# Altium PCB NodeBoard.PcbDoc
Units mm, origin at the board's own origin, x right, y up, seen from the top; angles counter-clockwise.
Board outline 129.64 x 129.64 mm, 2 copper layers (Top Layer, Bottom Layer); 22 components, 40 nets, 178 pads, 8 vias.
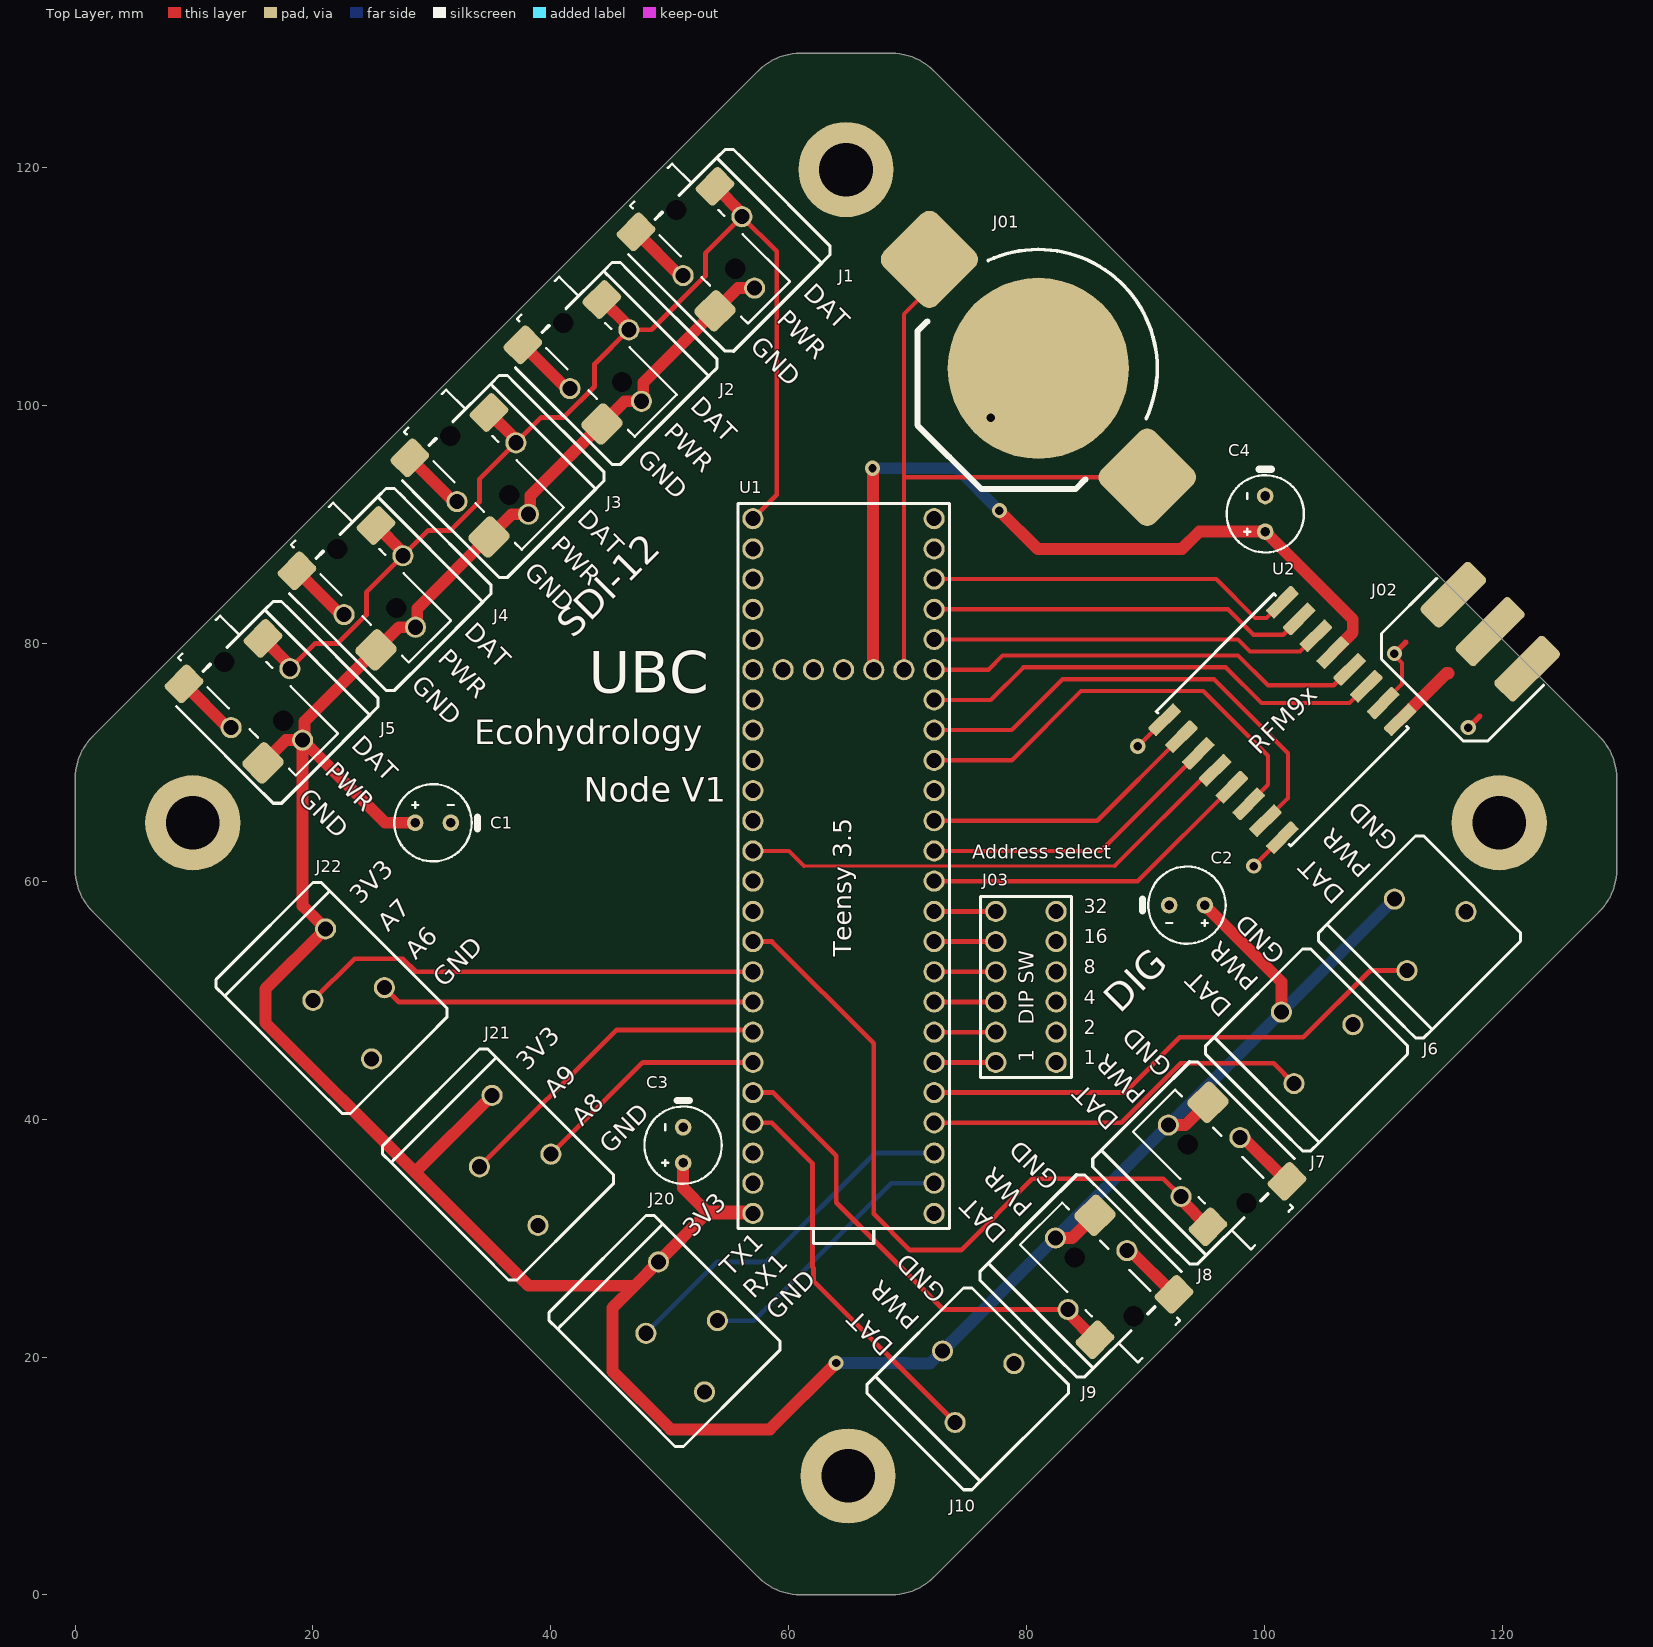
[diagram p0: Top Layer view]
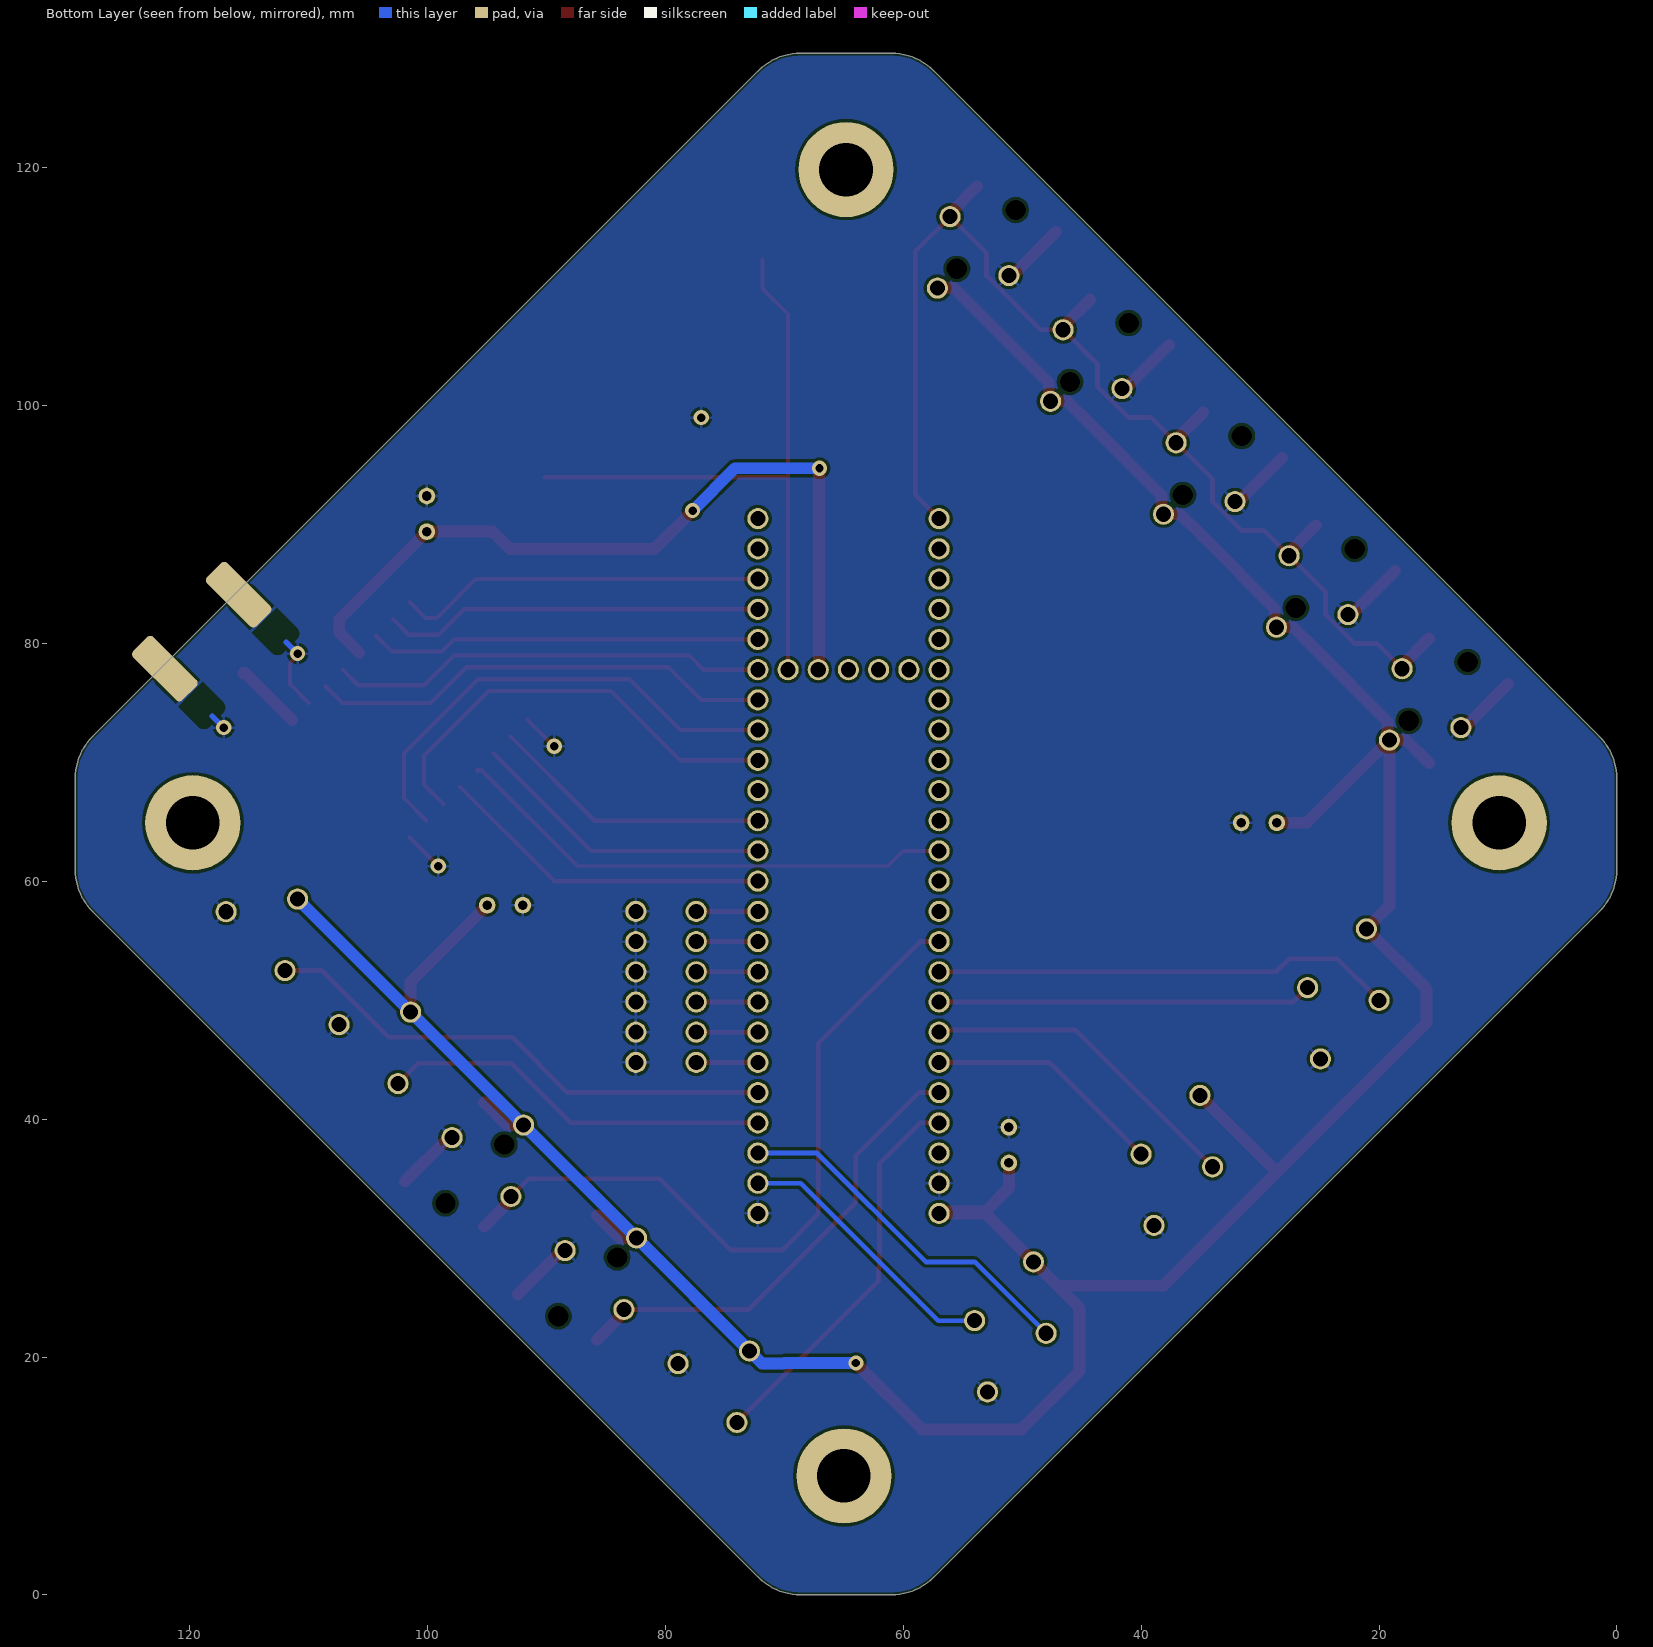
[diagram p1: Bottom Layer view, seen from below]

## Layer stack, top to bottom
Top Solder: solder mask 0.0102, Solder Resist, Dk 3.5
Top Layer: signal copper 0.0356
Dielectric 1: dielectric 0.32, FR-4, Dk 4.8
Bottom Layer: signal copper 0.0356
Bottom Solder: solder mask 0.0102, Solder Resist, Dk 3.5

## Board outline
1.471,57.471 cw(c5.006,61.006) 0.006,61.006 0.006,68.646 cw(c5.006,68.646) 1.471,72.181 57.471,128.181 cw(c61.006,124.646) 61.006,129.646 68.646,129.646 cw(c68.646,124.646) 72.181,128.181 128.181,72.181 cw(c124.646,68.646) 129.646,68.646 129.646,61.006 cw(c124.646,61.006) 128.181,57.471 72.181,1.471 cw(c68.646,5.006) 68.646,0.006 61.006,0.006 cw(c61.006,5.006) 57.471,1.471
cut-out: 119.157,67.251
cut-out: 119.516,66.892

## Design rules (kind name [scope] priority, off if disabled: settings)
BoardOutlineClearance [All] p1: gap=0.2 ignorepadtopadclearanceinfootprint=FALSE
Clearance [All] p1: gap=0.254 ignorepadtopadclearanceinfootprint=FALSE except(0: Arc-Hole Track-Hole SMDPad-Hole THPad-Hole Via-Hole Fill-Hole Poly-Hole Region-Hole Text-Hole)
PolygonConnect [All] p1: connectstyle=Relief reliefconductorwidth=0.254 reliefentries=4 polygonreliefangle="90 Angle" airgapwidth=0.254
RoutingVias [All] p1: holewidth=0.711 width=1.27 viastyle="Through Hole" minholewidth=0.711 minwidth=1.27 maxholewidth=0.711 maxwidth=1.27
SilkToSolderMaskClearance [IsPad] p1: minsilkscreentomaskgap=0.203 clearancetoexposedcopper=TRUE
SolderMaskExpansion [All] p1: expansion=0.102
Width [All] p1: maxlimit=1.27 minlimit=0.305 preferedwidth=0.406
29 further rules are at their usual default settings.

## Components (designator, comment, footprint, x,y, rotation, side; value= is the part's Value field where it differs from the comment)
C1 "10uF" "Cap small electrolytic" 31.597,64.927 r180 top
C2 "10uF" "Cap small electrolytic" 92,58 r0 top
C3 "10uF" "Cap small electrolytic" 51.126,39.322 r270 top
C4 "10uF" "Cap small electrolytic" 100.076,92.408 r270 top
J01 "Battery Retainer Coin, 20.0mm 1 Cell SMD (SMT) Tab" "Coin Battery" 81,103.143 r45 top
J1 "TERM BLOCK PCB 3POS 3.5MM GREEN" "Terminal Block Sen 3 pos jack"#1 48.086,118.935 r315 top
J02 "Antenna connector" "SMA Edge Connector" 119,81 r225 top
J2 "TERM BLOCK PCB 3POS 3.5MM GREEN" "Terminal Block Sen 3 pos jack"#2 46.566,106.384 r225 top
J03 "6 positions" "DIP SW 6 POS" 82.5,44.779 r90 top
J3 "TERM BLOCK PCB 3POS 3.5MM GREEN" "Terminal Block Sen 3 pos jack"#2 37.066,96.884 r225 top
J4 "TERM BLOCK PCB 3POS 3.5MM GREEN" "Terminal Block Sen 3 pos jack"#2 27.566,87.384 r225 top
J5 "TERM BLOCK PCB 3POS 3.5MM GREEN" "Terminal Block Sen 3 pos jack"#2 18.066,77.884 r225 top
J6 "TERM BLOCK PCB 3POS 3.5MM GREEN" "Terminal block SEN 3 pos label" 112,52.5 r45 top
J7 "TERM BLOCK PCB 3POS 3.5MM GREEN" "Terminal block SEN 3 pos label" 102.5,43 r45 top
J8 "TERM BLOCK PCB 3POS 3.5MM GREEN" "Terminal Block Sen 3 pos jack"#2 93,33.5 r45 top
J9 "TERM BLOCK PCB 3POS 3.5MM GREEN" "Terminal Block Sen 3 pos jack"#2 83.5,24 r45 top
J10 "TERM BLOCK PCB 3POS 3.5MM GREEN" "Terminal block SEN 3 pos label" 74,14.5 r45 top
J20 "TERM BLOCK PCB 4POS 3.5MM GREEN" "Terminal block 4 position" 45.525,24.475 r315 top
J21 "TERM BLOCK PCB 4POS 3.5MM GREEN" "Terminal block 4 position" 31.525,38.475 r315 top
J22 "TERM BLOCK PCB 4POS 3.5MM GREEN" "Terminal block 4 position" 17.525,52.475 r315 top
U1 "Teensy 3.5/3.6" "Teensy 3.6" 72.24,32.079 r90 top
U2 "LoRa Radio Transceiver Module" RFM9x 91.615,73.586 r45 top

## Footprints (in the part's own frame and the unit in brackets; to place one, negate y for a bottom-side part, rotate by r counter-clockwise, add the part's x,y. Pads: shape width x height; smd on the part's side, far side on the other; paste and mask are expansions set on the pad)
"Cap small electrolytic" [mm]
  round 1.4 hole 0.8: 1(0,0) 2(3,0)
  silkscreen extent -2.25,-3.25 4.75,3.25
"Coin Battery" [mil] "Battery Retainer Coin, 20.0mm 1 Cell SMD (SMT) Tab"
  rrect30% 250x250 smd: 1(0,510) 3(0,-510)
  round 600 smd: 2(0,0)
  silkscreen extent -416,-370 394,370
"DIP SW 6 POS" [mil] "6 position dip switch"
  round 70 hole 50: 1(0,0) 2(0,200) 3(100,0) 4(100,200) 5(200,0) 6(200,200) 7(300,0) 8(300,200) 9(400,0) 10(400,200) 11(500,0) 12(500,200)
  silkscreen extent -50,-50 550,250
RFM9x [mm]
  rrect20% 3x1 smd: 1(0,0) 2(0,-2) 3(0,-4) 4(0,-6) 5(0,-8) 6(0,-10) 7(0,-12) 8(0,-14) 9(14,-14) 10(14,-12) 11(14,-10) 12(14,-8) 13(14,-6) 14(14,-4) 15(14,-2) 16(14,0)
  silkscreen extent 0,-15 14,1
"SMA Edge Connector" [mil] "Antenna Edge Connector"
  rrect30% 230x95 smd far side: 1(0,173) 5(0,-173)
  rrect30% 230x95 smd: 2(0,173) 4(0,-173)
  rrect30% 250x90 smd: 3(0,0)
  Top Layer lines w18: 276,-173 222,-173 ; 276,173 222,173
  Bottom Layer lines w18: 276,-173 222,-173 ; 276,173 222,173
  silkscreen extent 0,-250 319,250
"Teensy 3.6" [mil]
  round 70 hole 50: 1(0,0) 2(100,0) 3(200,0) 4(300,0) 5(400,0) 6(500,0) 7(600,0) 8(700,0) 9(800,0) 10(900,0) 11(1000,0) 12(1100,0) 13(1200,0) 14(1300,0) 15(1400,0) 16(1500,0) 17(1600,0) 18(1700,0) 19(1800,0) 20(1900,0) 21(2000,0) 22(2100,0) 23(2200,0) 24(2300,0) 25(2300,600) 26(2200,600) 27(2100,600) 28(2000,600) 29(1900,600) 30(1800,600) 31(1700,600) 32(1600,600) 33(1500,600) 34(1400,600) 35(1300,600) 36(1200,600) 37(1100,600) 38(1000,600) 39(900,600) 40(800,600) 41(700,600) 42(600,600) 43(500,600) 44(400,600) 45(300,600) 46(200,600) 47(100,600) 48(0,600) 49(1800,100) 50(1800,200) 51(1800,300) 52(1800,400) 53(1800,500)
  silkscreen extent -100,-50 2350,650
"Terminal block 4 position" [mil]
  round 70 hole 50: 1(0,196.85) 2(137.8,0) 3(275.59,196.85) 4(412.21,0)
  silkscreen extent -138,-197 491,295
"Terminal Block Sen 3 pos jack"#1 [mm]
  rrect30% 2.2x2.8 smd: 1(2.4,-3.7) 3(4.4,3.7)
  round 1.778 hole 1.27: 1(7.8,-3.5) 2(12.8,0) 3(7.8,3.5)
  rrect30% 2.6x2.8 smd: 2(11.8,-3.7)
  round 1 hole 1.7 unplated: ""(3.5,0) ""(10.5,0)
  Top Layer lines w1: 2.4,-3.7 7.6,-3.7 7.8,-3.5 ; 11.8,-3.7 11.8,-1 12.8,0 ; 4.4,3.7 7.6,3.7 7.8,3.5
  silkscreen extent 0.5,-5.5 15.3,7
"Terminal Block Sen 3 pos jack"#2 [mm]
  round 1.778 hole 1.27: 1(7,0) 2(3.5,5) 3(0,0)
  rrect30% 2.8x2.2 smd: 1(7.2,-5.4) 3(-0.2,-3.4)
  rrect30% 2.8x2.6 smd: 2(7.2,4)
  round 1 hole 1.7 unplated: ""(3.5,2.7) ""(3.5,-4.3)
  Top Layer lines w1: 7.2,-5.4 7.2,-0.2 7,0 ; 7.2,4 4.5,4 3.5,5 ; -0.2,-3.4 -0.2,-0.2 0,0
  silkscreen extent -3.5,-7.3 9,7.5
"Terminal block SEN 3 pos label" [mil]
  round 70 hole 50: 1(275.59,0) 2(137.8,196.85) 3(0,0)
  silkscreen extent -138,-197 354,295

## Part data
C1 C2 C3 C4: library part "Capacitor Electrolytic 10uF"
J01: library part "Coin Battery", Case/Package=SMD/SMT, Manufacturer="Memory Protection Devices", Manufacturer Part Number=BK-883-TR, Max Operating Temperature=270°C, Min Operating Temperature=-40°C, Package Quantity=450, Supplier Part Number 1=BK-883-CT-ND, ComponentLink1Description=http://media.digikey.com/pdf/Data%20Sheets/Memory%20Protection%20PDFs/BK-883-TR.pdf?src-supplier=Digi-Key, ComponentLink1URL=http://media.digikey.com/pdf/Data%20Sheets/Memory%20Protection%20PDFs/BK-883-TR.pdf?src-supplier=Digi-Key, Diameter=20mm, Lead Free="Lead Free", Mount="PCB,Surface Mount", Number of Cells=1, Packaging="Cut Tape", Pricing 1="1 = 0.73000, 10 = 0.66100, 100 = 0.51380 (USD)", RoHS=Yes, Stock 1=118723, Supplier 1=Digi-Key, Termination=SMD/SMT
J1 J2 J3 J4 J5 J6 J7 J8 J9 J10: library part "Terminal Block Sensor", "3 Position Wire to Board Terminal Block 45° (135°) Angle with Board 0.138\" (3.50mm) Through Hole", Colour=Green, Current=2A, Flammability Rating="UL94 V-2", Manufacturer="Phoenix Contact", Manufacturer Part Number=1985205, Max Supply Voltage=250V, Package Quantity=250, Supplier Part Number 1=277-1623-ND, Voltage=300V, Approvals=UL,VDE, ComponentLink1Description=https://media.digikey.com/pdf/Data%20Sheets/Phoenix%20Contact%20PDFs/COMBICON%20Spring-Cage%20PCB%20Term.%20Blocks.pdf, ComponentLink1URL=https://media.digikey.com/pdf/Data%20Sheets/Phoenix%20Contact%20PDFs/COMBICON%20Spring-Cage%20PCB%20Term.%20Blocks.pdf, ComponentLink2Description=https://www.verical.com/server-webapp/html/getDatasheet?partID=743520, ComponentLink2URL=https://www.verical.com/server-webapp/html/getDatasheet?partID=743520, ComponentLink3Description=https://www.alliedelec.com/m/d/46afd96412b1b8fa400ea99294e4d68a.pdf, ComponentLink3URL=https://www.alliedelec.com/m/d/46afd96412b1b8fa400ea99294e4d68a.pdf, Contact Material=Tin, Current Rating=2A, Depth=12mm, Height=13.1mm, Housing Colour=Green, Housing Material=Polyamide, Insulation Material=Nylon, Lead Free="Lead Free", Length=12mm, Material=Nylon, Max Current Rating=2A, Mount="Through Hole", Number of Circuits=3, Number of Contacts=3, Number of Levels=1, Number of Pins=3, Number of Poles=3, Number of Positions=3, Number of Positions Per Level=3, Number of Rows=1, Packaging=Bulk, Pitch=3.5mm, Pricing 1="1=0.41, 10=0.391, 50=0.374, 100=0.3638, 250=0.34, 500=0.3128, 1000=0.289 (USD)", Radiation Hardening=No, Stock 1=12841, Stripping Length=8mm, Supplier 1=Digi-Key, Termination=Solder, Voltage Rating=250V, Weight=0.054322oz, Width=16.7mm, Wire/Cable Gauge=16AWG, Wire Gauge (Max)=24AWG, Wire Gauge (Min)=16AWG
J02: library part "SMA Connector", Case/Package=SMA, Manufacturer=Molex, Manufacturer Part Number=73251-1150, Package Quantity=1600, Supplier Part Number 1=WM5534-ND, Body Material=Brass, Body Plating=Gold, ComponentLink1Description=Datasheet, ComponentLink1URL=https://www.molex.com/pdm_docs/sd/732511150_sd.pdf, ComponentLink2Description=http://www.farnell.com/datasheets/1596721.pdf?src-supplier=Farnell, ComponentLink2URL=http://www.farnell.com/datasheets/1596721.pdf?src-supplier=Farnell, ComponentLink3Description=http://www.onlinecomponents.com/productFiles/mf-MOL/367520732511150_rf_coax_nectors.pdf?src-supplier=Onlinecomponents.com, ComponentLink3URL=http://www.onlinecomponents.com/productFiles/mf-MOL/367520732511150_rf_coax_nectors.pdf?src-supplier=Onlinecomponents.com, ComponentLink4Description=http://www.molex.com/webdocs/datasheets/pdf/en-us/0732511150_RF_COAX_CONNECTORS.pdf?src-supplier=Avnet, ComponentLink4URL=http://www.molex.com/webdocs/datasheets/pdf/en-us/0732511150_RF_COAX_CONNECTORS.pdf?src-supplier=Avnet, ComponentLink5Description=http://www.farnell.com/datasheets/2698429.pdf?src-supplier=Newark, ComponentLink5URL=http://www.farnell.com/datasheets/2698429.pdf?src-supplier=Newark, ComponentLink6Description=http://www.farnell.com/datasheets/2130139.pdf?src-supplier=Element14, ComponentLink6URL=http://www.farnell.com/datasheets/2130139.pdf?src-supplier=Element14, ComponentLink7Description=http://www.mouser.com/ds/2/276/0732511150_RF_COAX_CONNECTORS-173168.pdf?src-supplier=Mouser, ComponentLink7URL=http://www.mouser.com/ds/2/276/0732511150_RF_COAX_CONNECTORS-173168.pdf?src-supplier=Mouser, ComponentLink8Description=http://www.molex.com/webdocs/datasheets/pdf/en-us/0732511150_RF_COAX_CONNECTORS.pdf?src-supplier=Avnet+Europe, ComponentLink8URL=http://www.molex.com/webdocs/datasheets/pdf/en-us/0732511150_RF_COAX_CONNECTORS.pdf?src-supplier=Avnet+Europe, ComponentLink9Description=http://www.onlinecomponents.com/productFiles/mf-MOL/473370732511150_rf_coax_nectors.pdf?src-supplier=Onlinecomponents.com, ComponentLink9URL=http://www.onlinecomponents.com/productFiles/mf-MOL/473370732511150_rf_coax_nectors.pdf?src-supplier=Onlinecomponents.com, ComponentLink10Description=http://www.farnell.com/datasheets/1596721.pdf?src-supplier=Element14, ComponentLink10URL=http://www.farnell.com/datasheets/1596721.pdf?src-supplier=Element14, ComponentLink11Description=http://uk.rs-online.com/webdocs/13c4/0900766b813c49cf.pdf?src-supplier=RSComponents, ComponentLink11URL=http://uk.rs-online.com/webdocs/13c4/0900766b813c49cf.pdf?src-supplier=RSComponents, Connector Type=Coaxial,SMA, Contact Material=Copper, Contact Plating=Gold, Gender=Female, Halogen Free="Low Halogen", Impedance=50R, Lead Free="Lead Free", Mount=Edge,PCB, Orientation="Right Angle", Packaging=Bulk, Plating=Gold, Polarity=Normal,Standard, Pricing 1="1 = 3.49000, 10 = 3.35300, 25 = 3.07360, 50 = 2.93400, 100 = 2.79420, 250 = 2.44492, 500 = 2.37508, 1600 = 1.95594, 3200 = 1.88608 (USD)", Radiation Hardening=No, REACH SVHC=Unknown, RoHS=Yes, Stock 1=9431, Supplier 1=Digi-Key, Termination=Solder
J03: library part "DIP Switch", Contact Current Rating=1A, Contact Resistance=50mR, Flammability Rating="UL94 V-0", Housing Color=Black, Manufacturer="TE Connectivity", Manufacturer Part Number=1825057-5, Max Current Rating=100mA, Max Operating Temperature=85°C, Max Voltage Rating (DC)=24V, Min Operating Temperature=-30°C, Package Quantity=25, Supplier Part Number 1=450-1365-ND, Switching Capacity=400mW, Voltage Rating (DC)=5V, Actuator Length=1mm, Actuator Material=Polyamide, Actuator Type=Standard, ComponentLink1Description=https://datasheet.ciiva.com/16312/eng-cs-1308111-1-switches-core-program-catalog-0308-16312710.pdf?src-supplier=Future+Electronics, ComponentLink1URL=https://datasheet.ciiva.com/16312/eng-cs-1308111-1-switches-core-program-catalog-0308-16312710.pdf?src-supplier=Future+Electronics, ComponentLink2Description=https://datasheet.ciiva.com/26330/701621-da-01-en-dip-schalter-6polade-0604-26330291.pdf?src-supplier=Conrad, ComponentLink2URL=https://datasheet.ciiva.com/26330/701621-da-01-en-dip-schalter-6polade-0604-26330291.pdf?src-supplier=Conrad, ComponentLink3Description=https://datasheet.ciiva.com/8677/eng-cd-1825057-o2-8677113.pdf?src-supplier=Avnet, ComponentLink3URL=https://datasheet.ciiva.com/8677/eng-cd-1825057-o2-8677113.pdf?src-supplier=Avnet, ComponentLink4Description=https://datasheet.ciiva.com/17431/eng-cd-1825057-o2-17431643.pdf?src-supplier=Avnet+Europe, ComponentLink4URL=https://datasheet.ciiva.com/17431/eng-cd-1825057-o2-17431643.pdf?src-supplier=Avnet+Europe, ComponentLink5Description=https://datasheet.ciiva.com/30052/7365eng-cd-1825057-o2-30052347.pdf?src-supplier=Onlinecomponents.com, ComponentLink5URL=https://datasheet.ciiva.com/30052/7365eng-cd-1825057-o2-30052347.pdf?src-supplier=Onlinecomponents.com, Contact Material="Copper Alloy", Contact Plating=Gold, Contact Post Length=4mm, Depth=7.49mm, Electrical Life=1000Cycles, ELV=Compliant, Height=0.138inch, Housing Material=Polyphenylene, Lead Free="Lead Free", Length=17.22mm, Mount="Through Hole", Number of Circuits=6, Number of Pins=6, Number of Positions=6, Orientation=Straight, Packaging=Rail/Tube, Pitch=0.1inch, Pricing 1="1 = 1.09000, 10 = 1.06900, 25 = 1.00680, 50 = 0.94520, 100 = 0.90420, 250 = 0.86308, 500 = 0.78086, 1000 = 0.71922, 5000 = 0.58565 (USD)", Radiation Hardening=No, REACH SVHC="No SVHC", RoHS=Yes, Sealable="No (Without)", Stock 1=8675, Supplier 1=Digi-Key, Terminal Pitch=2.54mm, Termination="PC Pins", Throw Configuration=SPST, Type=Switch, Washable=Yes, Width=7.5mm
J20 J21 J22: library part "Terminal Block 4 pos", "4 Position Wire to Board Terminal Block 45° (135°) Angle with Board 0.138\" (3.50mm) Through Hole", Colour=Green, Current=2A, Flammability Rating="UL94 V-2", Manufacturer="Phoenix Contact", Manufacturer Part Number=1985205, Max Supply Voltage=250V, Package Quantity=250, Supplier Part Number 1=277-1623-ND, Voltage=300V, Approvals=UL,VDE, ComponentLink1Description=https://media.digikey.com/pdf/Data%20Sheets/Phoenix%20Contact%20PDFs/COMBICON%20Spring-Cage%20PCB%20Term.%20Blocks.pdf, ComponentLink1URL=https://media.digikey.com/pdf/Data%20Sheets/Phoenix%20Contact%20PDFs/COMBICON%20Spring-Cage%20PCB%20Term.%20Blocks.pdf, ComponentLink2Description=https://www.verical.com/server-webapp/html/getDatasheet?partID=743520, ComponentLink2URL=https://www.verical.com/server-webapp/html/getDatasheet?partID=743520, ComponentLink3Description=https://www.alliedelec.com/m/d/46afd96412b1b8fa400ea99294e4d68a.pdf, ComponentLink3URL=https://www.alliedelec.com/m/d/46afd96412b1b8fa400ea99294e4d68a.pdf, Contact Material=Tin, Current Rating=2A, Depth=12mm, Height=13.1mm, Housing Colour=Green, Housing Material=Polyamide, Insulation Material=Nylon, Lead Free="Lead Free", Length=12mm, Material=Nylon, Max Current Rating=2A, Mount="Through Hole", Number of Circuits=3, Number of Contacts=3, Number of Levels=1, Number of Pins=3, Number of Poles=3, Number of Positions=3, Number of Positions Per Level=3, Number of Rows=1, Packaging=Bulk, Pitch=3.5mm, Pricing 1="1=0.41, 10=0.391, 50=0.374, 100=0.3638, 250=0.34, 500=0.3128, 1000=0.289 (USD)", Radiation Hardening=No, Stock 1=12841, Stripping Length=8mm, Supplier 1=Digi-Key, Supplier 2=Digi-Key, Supplier Part Number 2=277-1624-ND, Termination=Solder, Voltage Rating=250V, Weight=0.054322oz, Width=16.7mm, Wire/Cable Gauge=16AWG, Wire Gauge (Max)=24AWG, Wire Gauge (Min)=16AWG
U1: library part "Teensy 3.5/6"
U2: library part RFM95W, Manufacturer="RF Solutions", Manufacturer Part Number=RFM95W-915S2, Supplier Part Number 1=RFM95W-915S2-ND, ComponentLink1Description=Datasheet, ComponentLink1URL=https://cdn-learn.adafruit.com/assets/assets/000/031/659/original/RFM95_96_97_98W.pdf?1460518717, ComponentLink2Description=Adafruit, ComponentLink2URL=https://www.adafruit.com/product/3072, ComponentLink3Description=Digikey, ComponentLink3URL=https://www.digikey.ca/product-detail/en/rf-solutions/RFM95W-915S2/RFM95W-915S2-ND/6564923, Pricing 1="1 = 13.84000 (USD)", Stock 1=802, Supplier 1=Digi-Key

## Free pads (board coordinates)
  round 8 hole 4.5 unplated: 51(9.899,64.927) 51(64.826,119.855) 51(65,10) 51(119.754,64.927)

## Via types
v1: diameter 1.27, hole 0.711, Top Layer to Bottom Layer, 8 vias

## Nets (pads, with @x,y where several pads share a name; then routed paths per layer and width w, separated by ;. In a path a pad name is that pad's centre, name@x,y a point inside that pad or via, vN(x,y) a via of type N, cw(c..) or ccw(c..) an arc to the next point about the centre after c; other vN are vias at no path point)
+3V3: C4.2 U1.50 U2.13 | length 67.3
  Top Layer w1: v1(67.056,94.742) 67.108,94.69 67.108,77.852 U1.50 ; v1(77.724,91.186) 80.96,87.95 93.07,87.95 94.528,89.408 C4.2 107.442,82.042 107.442,80.927 U2.13
  Bottom Layer w1: v1(67.056,94.742) 74.168,94.742 v1(77.724,91.186)
+5V: C1.2 C2.2 C3.2 J1.2 J2.2 J3.2 J4.2 J5.2 J6.2 J7.2 J8.2 J9.2 J10.2 J20.1 J21.1 J22.1 U1.48 | length 256.5
  Top Layer w0.762: C2.2 C2.2@95.173,58
  Top Layer w1: J4.2@25.303,79.464 19.275,73.437 19.275,72.023 J5.2@19.126,71.874 ; C1.2 26.073,64.927 J5.2@19.126,71.874 ; J4.2@28.626,81.374 28.775,81.523 28.775,82.937 J3.2@34.803,88.964 ; J21.1 28.626,35.576 28.626,35.5 ; J3.2@38.126,90.874 38.275,91.023 38.275,92.437 J2.2@44.303,98.464 ; J2.2@47.626,100.374 47.775,100.523 47.775,101.937 J1.2@53.813,107.975 ; C3.2@51.05,36.245 C3.2 51.126,34.218 53.116,32.228 56.851,32.228 U1.48 53.13,32.079 J20.1 47.05,26 ; v1(64,19.5) 58.424,13.924 50.076,13.924 45.189,18.811 45.189,24.139 47.05,26 ; C2.2 101.439,51.561 J7.2 ; J5.2@19.126,71.874 19.126,57.945 J22.1 16,50.95 16,48.126 28.626,35.5 ; 28.626,35.5 38.126,26 47.05,26
  Bottom Layer w1: v1(64,19.5) 70,19.5 70.05,19.45 71.879,19.45 J10.2 82.439,30.01 91.939,39.51 J7.2 J6.2
A1: U1.37
A2: U1.38
A4: J22.2 U1.40 | length 38.9
  Top Layer w0.406: J22.2 23.5,53.5 27.566,53.5 28.666,52.399 U1.40
A5: J22.3 U1.41 | length 31.5
  Top Layer w0.406: J22.3 27.212,49.859 U1.41
A6: J21.2 U1.42 | length 27.8
  Top Layer w0.406: J21.2 45.5,47.5 56.819,47.5 U1.42
A7: J21.3 U1.43 | length 20.2
  Top Layer w0.406: J21.3 47.729,44.779 U1.43
ASIG: J02.3 U2.9 | length 5.7
  Top Layer w1.016: U2.9 115.329,77.5 115.5,77.5
CS0: U1.12 U2.5 | length 28.3
  Top Layer w0.356: U1.12 89.362,60.019 U2.5
D2: J7.3 U1.4 | length 33
  Top Layer w0.406: U1.4 87.954,39.699 92.959,44.704 100.796,44.704 J7.3
D3: J6.3 U1.5 | length 44
  Top Layer w0.406: U1.5 88.255,42.239 92.905,46.889 103.277,46.889 108.888,52.5 J6.3
D4: J03.2 U1.6 | length 5.2
  Top Layer w0.406: U1.6 J03.2
D5: J03.4 U1.7 | length 5.2
  Top Layer w0.406: U1.7 J03.4
D6: J03.6 U1.8 | length 5.2
  Top Layer w0.406: U1.8 J03.6
D7: J03.8 U1.9 | length 5.2
  Top Layer w0.406: U1.9 J03.8
D8: J03.10 U1.10 | length 5.2
  Top Layer w0.406: U1.10 J03.10
D9: J03.12 U1.11 | length 5.2
  Top Layer w0.406: U1.11 J03.12
D17: J8.3 U1.39 | length 58.3
  Top Layer w0.406: U1.39 58.599,54.939 67.16,46.378 67.16,32.04 70.2,29 74.5,29 80.5,35 91.5,35 J8.3@93,33.5
D22: J9.3 U1.44 | length 36.4
  Top Layer w0.406: U1.44 58.694,42.239 64,36.934 64,33 73,24 J9.3@83.5,24
D23: J10.3 U1.45 | length 33.2
  Top Layer w0.406: U1.45 58.599,39.699 62,36.298 62,27.58 62.08,27.5 62.08,26.42 J10.3
D24: U1.16 U2.6 | length 37.4
  Top Layer w0.356: U1.16 78.76,70.179 84.581,76 94.865,76 100.301,70.564 100.301,68.129 U2.6
D25: U1.17 U2.7 | length 40.6
  Top Layer w0.356: U1.17 78.76,72.719 83.041,77 95.777,77 102,70.777 102,67 U2.7
D26: U1.18 U2.11 | length 39.3
  Top Layer w0.356: U1.18 77,75.259 79.741,78 96.759,78 99.759,75 107.172,75 U2.11
D27: U1.19 U2.12 | length 37
  Top Layer w0.356: U1.19 76.799,77.799 78,79 97.799,79 100.301,76.498 105.841,76.498 U2.12
D28: U1.20 U2.14 | length 33.1
  Top Layer w0.356: U1.20 97.777,80.339 98.789,79.327 103.013,79.327 U2.14
D29: U1.21 U2.15 | length 32.1
  Top Layer w0.356: U1.21 96.959,82.879 99.098,80.741 101.599,80.741 U2.15
D30: U1.22 U2.16 | length 31.2
  Top Layer w0.356: U1.22 95.96,85.419 99.224,82.155 100.185,82.155 U2.16
D31: U1.23
D32: U1.24
GND: C1.1 C2.1 C3.1 C4.1 J1.1 J01.2 J2.1 J02.1 J02.2 J02.4 J02.5 J3.1 J03.1 J03.3 J03.5 J03.7 J03.9 J03.11 J4.1 J5.1 J6.1 J7.1 J8.1 J9.1 J10.1 J20.4 J21.4 J22.4 U1.1 U1.47 U2.1 U2.8 U2.10 | length 11.6
  Top Layer w0.356: v1(89.362,71.362) 89.392,71.362 U2.1 ; v1(99.118,61.289) U2.8 ; U2.10 111.586,76.586 111.586,78.363 110.936,79.013 v1(110.936,79.15)
  other v1: 117.15,72.936 77,99
LED: U1.35
MISO0: U1.14 U2.2 | length 23.7
  Top Layer w0.356: U1.14 85.957,65.099 U2.2
MOSI0: U1.13 U2.3 | length 25.6
  Top Layer w0.356: U1.13 86.246,62.559 U2.3
RX1: J20.3 U1.2 | length 23
  Bottom Layer w0.406: J20.3 57.075,23.061 68.634,34.619 U1.2
RX5: U1.26
SCK0: U1.36 U2.4 | length 42.7
  Top Layer w0.254: 61.289,61.289 87.418,61.289
  Top Layer w0.356: U1.36 60.019,62.559 61.289,61.289 ; 87.418,61.289 95.472,69.343 U2.4
TX1: J20.2 U1.3 | length 30.5
  Bottom Layer w0.406: J20.2 54,28 58.12,28 67.279,37.159 U1.3
TX5: J1.3 J2.3 J3.3 J4.3 J5.3 U1.25 | length 85.7
  Top Layer w0.406: J5.3@18.066,77.884 20.193,80.012 22.097,80.012 24.5,82.415 24.5,84.318 27.566,87.384 29.693,89.512 31.597,89.512 34,91.915 34,93.818 37.066,96.884 39.193,99.012 41.097,99.012 43.677,101.591 43.677,103.495 46.566,106.384 48.469,106.384 53,110.915 53,112.818 56.076,115.894 59,112.971 59,92.499 U1.25
VBat: J01.1 J01.3 U1.49 | length 55.9
  Top Layer w0.356: U1.49 69.7,94 ; J01.1 71.84,109.84 69.7,107.7 69.7,94 ; J01.3 69.717,93.983 69.7,94
pads on no net: J1. J2. J3. J4. J5. J8. J9. U1.15 U1.27 U1.28 U1.29 U1.30 U1.31 U1.32 U1.33 U1.34 U1.46 U1.51 U1.52 U1.53

## Polygon pours and split planes (outlines as drawn)
GND on Bottom Layer "GND_L02_P000" (solid, pour order 0): 1.471,57.471 cw(c5.006,61.006) 0.006,61.006 0.006,68.646 cw(c5.006,68.646) 1.471,72.181 57.471,128.181 cw(c61.006,124.646) 61.006,129.646 68.646,129.646 cw(c68.646,124.646) 72.181,128.181 128.181,72.181 cw(c124.646,68.646) 129.646,68.646 129.646,61.006 cw(c124.646,61.006) 128.181,57.471 72.181,1.471 cw(c68.646,5.006) 68.646,0.006 61.006,0.006 cw(c61.006,5.006) 57.471,1.471

## Other copper
Top Layer:
  pour cut-out: 65.735,122.294

## Silkscreen, mask and mechanical layers (free items; w line width, h text height)
Top Overlay:
  text "SDI-12" at 42.418,79.756 h4 r45
  text "UBC" at 43.18,74.676 h6
  text "Ecohydrology" at 33.549,70.866 h3.5
  text "Node V1" at 42.771,66.04 h3.5
  text "Address select" at 75.438,61.468 h2
  text "3V3" at 24,58 h1.52 r45
  text "32" at 84.836,56.896 h2
  text "A7" at 26.333,55.667 h1.52 r45
  text "16" at 84.836,54.36 h2
  text "A6" at 28.667,53.333 h1.52 r45
  text "8" at 84.836,51.825 h2
  text "GND" at 31,51 h1.52 r45
  text "4" at 84.836,49.267 h2
  text "DIG" at 88.45,48.26 h4 r45
  text "2" at 84.834,46.732 h2
  text "1" at 84.836,44.196 h2
  text "3V3" at 38,44 h1.52 r45
  text "A9" at 40.333,41.667 h1.52 r45
  text "A8" at 42.667,39.333 h1.52 r45
  text "GND" at 45,37 h1.52 r45
  text "3V3" at 52,30 h1.52 r45
  text "TX1" at 55.118,26.67 h1.52 r45
  text "RX1" at 57.059,24.835 h1.52 r45
  text "GND" at 59,23 h1.52 r45
Mechanical 1:
  circle w0.013: c64.826,119.754 r2.25
  circle w0.013: c119.754,64.826 r2.25
  circle w0.013: c64.826,9.899 r2.25
  circle w0.013: c9.899,64.826 r2.25
  lines w0.013: 0.006,61.006 ccw(c5.006,61.006) 1.471,57.471 57.471,1.471 ccw(c61.006,5.006) 61.006,0.006 68.646,0.006 ccw(c68.646,5.006) 72.181,1.471 128.181,57.471 ccw(c124.646,61.006) 129.646,61.006 129.646,68.646 ccw(c124.646,68.646) 128.181,72.181 72.182,128.181 ccw(c68.646,124.646) 68.646,129.646 61.006,129.646 ccw(c61.006,124.646) 57.471,128.181 1.471,72.182 ccw(c5.006,68.646) 0.006,68.646 0.006,61.006
  lines w0.254: 60,115 60,115

## Text inside footprints (layer, text, board x,y; h text height)
J1: Top Overlay "DAT" at 61.167,109.389 h1.52 r315; Top Overlay "PWR" at 58.936,107.158 h1.52 r315; Top Overlay "GND" at 56.705,104.927 h1.52 r315
J2: Top Overlay "GND" at 47.195,95.417 h1.52 r315; Top Overlay "PWR" at 49.426,97.648 h1.52 r315; Top Overlay "DAT" at 51.657,99.879 h1.52 r315
J03: Top Overlay "DIP SW" at 80.595,47.954 h1.27 r90; Top Overlay "1" at 80.595,44.779 h1.27 r90
J3: Top Overlay "GND" at 37.695,85.917 h1.52 r315; Top Overlay "PWR" at 39.926,88.148 h1.52 r315; Top Overlay "DAT" at 42.157,90.379 h1.52 r315
J4: Top Overlay "GND" at 28.195,76.417 h1.52 r315; Top Overlay "PWR" at 30.426,78.648 h1.52 r315; Top Overlay "DAT" at 32.657,80.879 h1.52 r315
J5: Top Overlay "GND" at 18.695,66.917 h1.52 r315; Top Overlay "PWR" at 20.926,69.148 h1.52 r315; Top Overlay "DAT" at 23.157,71.379 h1.52 r315
J6: Top Overlay "DAT" at 106.909,59.005 h1.52 r135; Top Overlay "PWR" at 109.14,61.236 h1.52 r135; Top Overlay "GND" at 111.371,63.467 h1.52 r135
J7: Top Overlay "DAT" at 97.409,49.505 h1.52 r135; Top Overlay "PWR" at 99.64,51.736 h1.52 r135; Top Overlay "GND" at 101.871,53.967 h1.52 r135
J8: Top Overlay "DAT" at 87.909,40.005 h1.52 r135; Top Overlay "PWR" at 90.14,42.236 h1.52 r135; Top Overlay "GND" at 92.371,44.467 h1.52 r135
J9: Top Overlay "DAT" at 78.409,30.505 h1.52 r135; Top Overlay "PWR" at 80.64,32.736 h1.52 r135; Top Overlay "GND" at 82.871,34.967 h1.52 r135
J10: Top Overlay "DAT" at 68.909,21.005 h1.52 r135; Top Overlay "PWR" at 71.14,23.236 h1.52 r135; Top Overlay "GND" at 73.371,25.467 h1.52 r135
U1: Top Overlay "Teensy 3.5" at 65.255,53.669 h1.52 r90
U2: Top Overlay "RFM9x" at 99.57,70.581 h1.52 r45